# Altium PCB PCB1.PcbDoc
Units mil, origin at the board's own origin, x right, y up, seen from the top; angles counter-clockwise.
Board outline 6000 x 4000 mil, 4 copper layers (Top Layer, Int1 (GND), Int2 (PWR), Bottom Layer), stack 61.811 mil thick; 11 components, 24 nets, 109 pads, 29 vias.
Unrouted connection lines stored in the file: 36.
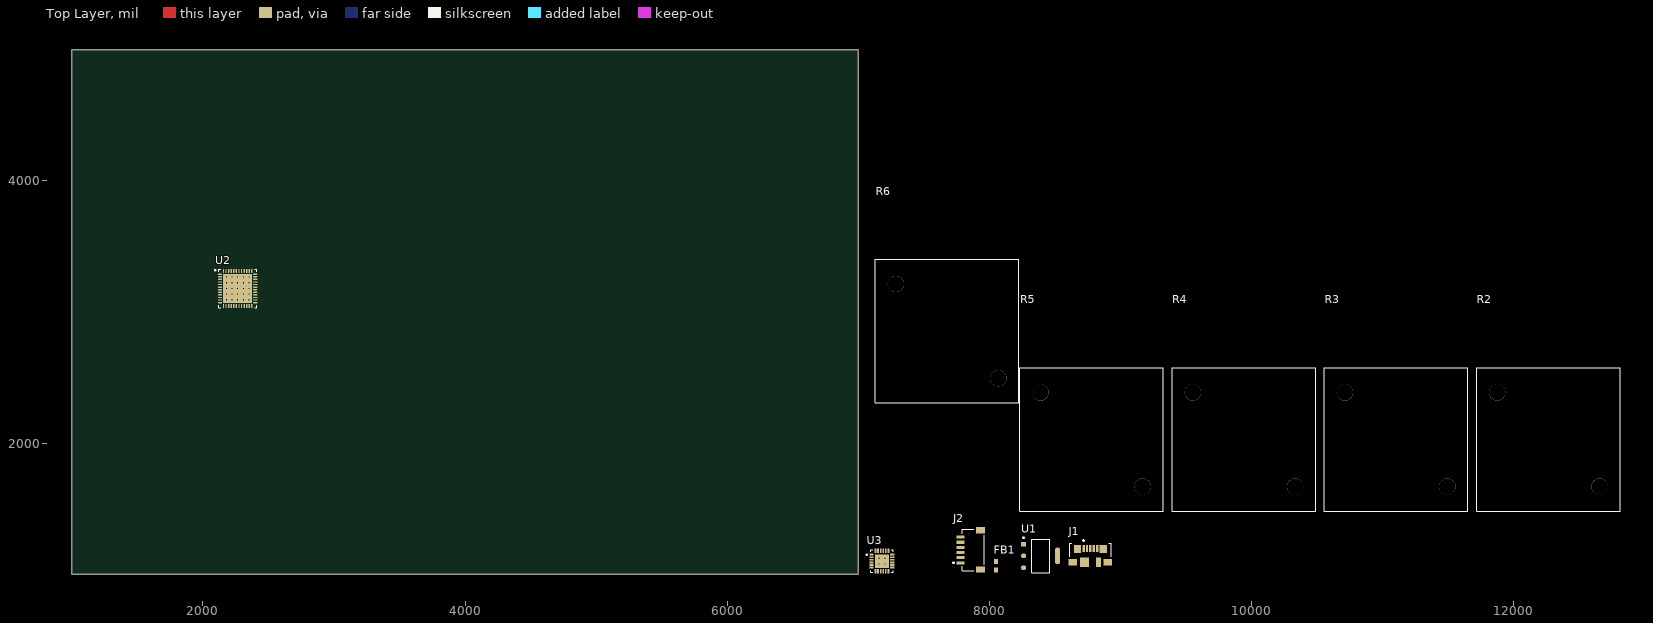
[diagram p0: Top Layer view]
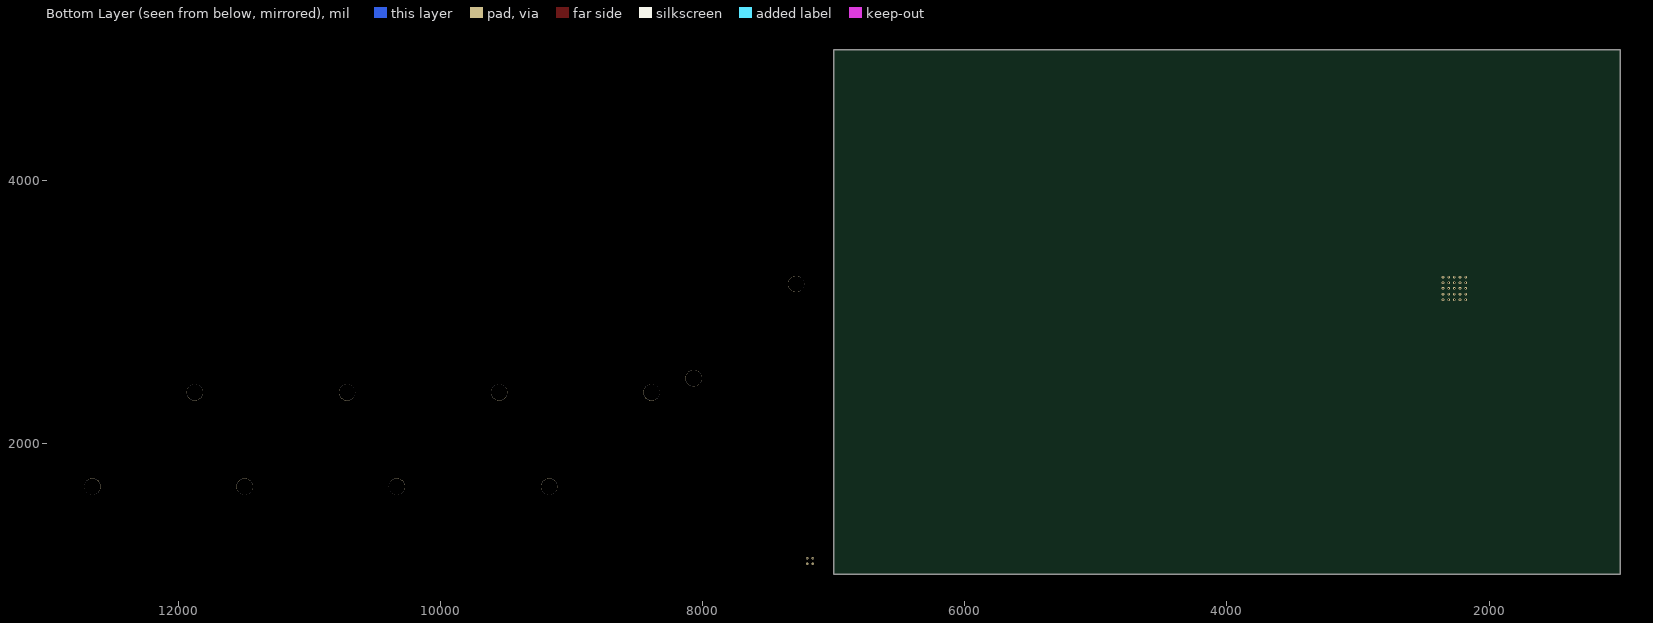
[diagram p1: Bottom Layer view, seen from below]

## Layer stack, top to bottom
Top Solder: solder mask 1, SM-001, Dk 4
Top Layer: signal copper 1.378
Dielectric 1: prepreg 7.874, PP-017, Dk 4.6
Int1 (GND): signal copper 0.689
Dielectric 3: core 41.9291, Core-039, Dk 4.6
Int2 (PWR): signal copper 0.689
Dielectric 5: prepreg 7.874, PP-017, Dk 4.6
Bottom Layer: signal copper 1.378
Bottom Solder: solder mask 1, SM-001, Dk 4

## Board outline
1000,1000 7000,1000 7000,5000 1000,5000

## Design rules (kind name [scope] priority, off if disabled: settings)
Clearance [All] p1: gap=0.2 ignorepadtopadclearanceinfootprint=FALSE
DiffPairsRouting [All] p1: maxlimit=10 minlimit=10 mostfreqgap=10 toplayer_minwidth=15 toplayer_maxwidth=15 toplayer_prefwidth=15 midlayer1_minwidth=15 midlayer1_maxwidth=15 midlayer1_prefwidth=15 midlayer2_minwidth=15 midlayer2_maxwidth=15 midlayer2_prefwidth=15 bottomlayer_minwidth=15 bottomlayer_maxwidth=15 bottomlayer_prefwidth=15 maxuncoupledlength=500
PolygonConnect [All] p1: connectstyle=Direct reliefconductorwidth=10 reliefentries=4 polygonreliefangle="90 Angle" airgapwidth=10
RoutingVias [All] p1: holewidth=28 width=50 viastyle="Through Hole" minholewidth=28 minwidth=50 maxholewidth=28 maxwidth=50
SolderMaskExpansion [All] p1: expansion=0 istentingtop=FALSE
SupplyNets "Schematic Supply Nets_5" [InNet('MCU_LED_K')] p1: voltage=0.000
SupplyNets "Schematic Supply Nets_4" [InNet('IMU_SCL')] p2: voltage=0.000
SupplyNets "Schematic Supply Nets_3" [InNet('VBUS')] p3: voltage=0.000
SupplyNets "Schematic Supply Nets_1" [InNet('+5V')] p4: voltage=0.000
UnRoutedNet [All] p1: checkbadconnections=TRUE
Width [All] p1: maxlimit=39.37 minlimit=7.87 preferedwidth=11.81 midlayer1_minwidth=10 midlayer1_maxwidth=10 midlayer1_prefwidth=10 midlayer2_minwidth=10 midlayer2_maxwidth=10 midlayer2_prefwidth=10 minimp=50.000000 maximp=50.000000 favimp=50.000000
28 further rules are at their usual default settings.

## Classes and differential pairs
differential pair class DIFF_USB: USB_D
differential pair USB_D: +USB_D_P -USB_D_N

## Components (designator, comment, footprint, x,y, rotation, side; value= is the part's Value field where it differs from the comment)
FB1 "120R" "WE-CBF HF_0603_HC" 8050,1065 r90 top
J1 "473460001" FP-473460001-MFG 8770,1105 r0 top
J2 "SM06B-SRSS-G-TB(LF)(SN)" FP-SM06B-SRSS-G-TB_LF_SN-MFG 7875,1185 r90 top
R2 "2K2" FP-RHA025-MFG 12263.75,2027.56 r90 top
R3 "2K2" FP-RHA025-MFG 11102.34,2027.56 r90 top
R4 "1K" FP-RHA025-MFG 9940.92,2027.56 r90 top
R5 "10K" FP-RHA025-MFG 8779.51,2027.56 r90 top
R6 "10K" FP-RHA025-MFG 7677.17,2854.33 r90 top
U1 "AMS1117-3.3" FP-AMS1117-IPC_C 8390,1140 r0 top
U2 "STM32F411CEU6" STM-UFQFPN48_L 2265,3180 r0 top
U3 "MPU-6050" IS-QFN-24_V 7180,1100 r0 top

## Footprints (in the part's own frame and the unit in brackets; to place one, negate y for a bottom-side part, rotate by r counter-clockwise, add the part's x,y. Pads: shape width x height; smd on the part's side, far side on the other; paste and mask are expansions set on the pad)
FP-473460001-MFG [mm]
  rect 0.45x1.38 smd paste+0 mask+0: 1(-1.3,2.31) 2(-0.65,2.31) 3(0,2.31) 4(0.65,2.31) 5(1.3,2.31)
  rect 1.425x1.55 smd paste+0 mask+0: 6(-2.488,2.225) 7(2.488,2.225)
  rect 1.65x1.3 smd paste+0 mask+0: 8(-3.375,-0.35) 11(3.375,-0.35)
  rect 1.8x1.9 smd paste+0 mask+0: 9(-1.15,-0.35)
  rect 1x1.9 smd paste+0 mask+0: 10(1.55,-0.35)
  silkscreen extent -4.05,0.67 4.05,3.97, body extent -4.3,-2.48 4.3,3.45, height 0.25
FP-AMS1117-IPC_C [mm]
  rect 1.004x0.872 smd paste+0 mask+0: 1(-3.295,2.29)
  rrect100% 1.004x0.872 smd paste+0 mask+0: 2(-3.295,0) 3(-3.295,-2.29)
  rrect87% 1.004x3.182 smd paste+0 mask+0: 4(3.295,0)
  silkscreen extent -3.42,-3.25 1.75,3.62, body extent -3.9,-3.35 3.9,3.35, height 0.25
FP-RHA025-MFG [mm]
  round 3.18 hole 3.18 unplated paste-2539.97 mask+0: ""(-9.13,-9.92) ""(9.13,9.92)
  silkscreen extent -13.88,-13.91 13.88,13.91, body extent -25.5,-14.01 25.5,14.01, height 0.25
FP-SM06B-SRSS-G-TB_LF_SN-MFG [mm]
  rect 0.6x1.55 smd paste+0 mask+0: 1(-2.5,2.45) 2(-1.5,2.45) 3(-0.5,2.45) 4(0.5,2.45) 5(1.5,2.45) 6(2.5,2.45)
  rect 1.2x1.8 smd paste+0 mask+0: 7(-3.8,-1.425) 8(3.8,-1.425)
  silkscreen extent -4,-2.12 4,3.92, body extent -4.5,-2.42 4.5,3.32, height 0.25
IS-QFN-24_V [mm] "QFN, 24-Leads, Body 4x4mm, Pitch 0.5mm, Thermal Pad 2.7x2.6mm"
  rect 0.8x0.35 smd: 1(-2,1.25) 2(-2,0.75) 3(-2,0.25) 4(-2,-0.25) 5(-2,-0.75) 6(-2,-1.25) 13(2,-1.25) 14(2,-0.75) 15(2,-0.25) 16(2,0.25) 17(2,0.75) 18(2,1.25)
  rect 0.35x0.85 smd mask+0.102: 7(-1.25,-1.975) 8(-0.75,-1.975) 9(-0.25,-1.975) 10(0.25,-1.975) 11(0.75,-1.975) 12(1.25,-1.975) 19(1.25,1.975) 20(0.75,1.975) 21(0.25,1.975) 22(-0.25,1.975) 23(-0.75,1.975) 24(-1.25,1.975)
  rect 2.7x2.6 smd: 25(0,0)
  silkscreen extent -3.07,-2.15 2.15,2.15, body extent -2,-2 2,2, height 0.95
STM-UFQFPN48_L [mm] "QFN, 48-Leads, Body 7.1x7.1mm, Pitch 0.5mm, Thermal Pad 5.6x5.6mm, IPC High Density"
  oval 0.8x0.25 smd: 1(-3.4,2.75) 2(-3.4,2.25) 3(-3.4,1.75) 4(-3.4,1.25) 5(-3.4,0.75) 6(-3.4,0.25) 7(-3.4,-0.25) 8(-3.4,-0.75) 9(-3.4,-1.25) 10(-3.4,-1.75) 11(-3.4,-2.25) 12(-3.4,-2.75) 25(3.4,-2.75) 26(3.4,-2.25) 27(3.4,-1.75) 28(3.4,-1.25) 29(3.4,-0.75) 30(3.4,-0.25) 31(3.4,0.25) 32(3.4,0.75) 33(3.4,1.25) 34(3.4,1.75) 35(3.4,2.25) 36(3.4,2.75)
  oval 0.25x0.8 smd: 13(-2.75,-3.4) 14(-2.25,-3.4) 15(-1.75,-3.4) 16(-1.25,-3.4) 17(-0.75,-3.4) 18(-0.25,-3.4) 19(0.25,-3.4) 20(0.75,-3.4) 21(1.25,-3.4) 22(1.75,-3.4) 23(2.25,-3.4) 24(2.75,-3.4) 37(2.75,3.4) 38(2.25,3.4) 39(1.75,3.4) 40(1.25,3.4) 41(0.75,3.4) 42(0.25,3.4) 43(-0.25,3.4) 44(-0.75,3.4) 45(-1.25,3.4) 46(-1.75,3.4) 47(-2.25,3.4) 48(-2.75,3.4)
  rect 5.6x5.6 smd: 49(0,0)
  silkscreen extent -4.47,-3.7 3.7,3.7, body extent -3.55,-3.55 3.55,3.55, height 0.6
"WE-CBF HF_0603_HC" [mm] "SMD EMI Suppression Ferrite  Bead, body 1.60x0.80mm"
  rect 0.95x0.7 smd: 1(-0.825,0) 2(0.825,0)
  body extent -0.8,-0.4 0.8,0.4, height 0.8

## Part data
FB1: library part CMP-0220-00101-3, "Ferrite Bead (emi Suppression), 1.6X0.8X0.8MM (0603), 600O Impedance At 100 Mhz", Case Code (Imperial)=0603, Case Code (Metric)=1608, Case/Package=SMD/SMT, Current Rating=400mA, DC Resistance (DCR)=220mΩ, Max Current Rating=500mA, Max Operating Temperature=125°C, Min Operating Temperature=-55°C, Resistance=350mΩ, Test Frequency=100MHz, Tolerance=25%, Core Material=Ferrite, Depth=800µm, Height=800µm, Impedance=600Ω, Lead Free="Lead Free", Length=1.6mm, Max DC Current=500mA, Mount="Surface Mount", Number of Lines=1, Number of Pins=2, REACH SVHC=Unknown, RoHS=Compliant, Termination=SMD/SMT, Width=800µm
J1: library part CMP-2000-05246-2, "CONN RCPT USB2.0 MICRO B SMD R/A", Current Rating=1.8A, Manufacturer=Molex, Package=0, Temperature="-30°C to +85°C", Temperature Range High=+85°C, Temperature Range Low=-30°C, Voltage Rating=30V, Automotive=No, Category=Conn, ComponentLink2Description=Datasheet, ComponentLink2URL=https://www.molex.com/webdocs/datasheets/pdf/en-us/0473460001_IO_CONNECTORS.pdf, Conn Orientation="Right Angle", Contact Material=Gold,Nickel, Device Class L1=Connectors, Device Class L2="USB Connectors", Device Class L3=unset, Digikey Description="CONN RCPT USB2.0 MICRO B SMD R/A", Footprint Url=https://www.molex.com/pdm_docs/sd/473460001_sd.pdf, Height=2.945mm, Is Female=yes, Lead Free=Yes, Manufacturer Part Number=473460001, Number Of Contacts=5, Octopart=https://octopart.com/47346-0001-molex-7164928, Pitch=0.65mm, RoHS=TRUE, Shielding=true, Usb Standard="USB 2.0"
J2: library part CMP-17439-000248-1, "6 Circuit Side Entry Shrouded SR Header", Connector Type=Header, Lead Free="Lead Free"
R2 R3 R4 R5: library part CMP-00030-120001975-1, "RHA0251K000FE02 Wirewound Chassis Mount Resistor", NexarPartId=120001975
R6: library part CMP-26527-006345-1, "0.33Ω ±1% 1W 2512 Thick Film Chip Resistor AEC-Q200 compliant", NexarPartId=120001975
U1: library part CMP-209535-000001-1, "LDO Voltage Regulators 1A, 3.3V", Dropout Voltage=1.1V, Manufacturer="Advanced Monolithic Systems", Max Junction Temp=+125°C, Max Power Dissipation=1.2W, Max Supply Voltage=15V, Nominal Supply Current=5mA, Output Current=1A, Output Voltage=3.3V, Package=AMS1117, Temperature="-40°C to +125°C", Temperature Range Low=-40°C, Automotive=No, Category=IC, ComponentLink2Description=Datasheet, ComponentLink2URL=http://www.advanced-monolithic.com/pdf/ds1117.pdf, Device Class L1="Integrated Circuits (ICs)", Device Class L2="Power Management ICs", Device Class L3="Voltage Regulators - Linear", Height=1.8mm, Ipc Land Pattern Name=SOT229P700X180-4, Lead Free=Yes, Manufacturer Part Number=AMS1117-3.3, Number Of Outputs=1, Octopart=https://octopart.com/ams1117-3.3-advanced+monolithic+systems-25899300, Output Type=Fixed, RoHS=TRUE, Standoff Height=0.64mm, Temperature Range High=+125°C
U2: library part CMP-0243-00165-1, "ARM Cortex-M4 32-bit MCU+FPU, 512 KB Flash, 128 KB RAM, 36 I/Os, 48-Pin UFQFPN, -40 to 85 degC, Tray", I/Os (High Current)=36, Operating Frequency(F) (Processor speed) (MHz)=100, Package Description=UFQFPN48, Package Reference="48-Pin Ultra Thin Fine Pitch Quad Flat No-Lead, 7 x 7 x 0.6 mm Body, 0.5 mm Pitch, Exposed Pad", Supply Voltage(Vcc) min (V)=1.7, ComponentLink1Description="Manufacturer URL", ComponentLink1URL=http://www.st.com/, ComponentLink2Description=Datasheet, ComponentLink2URL=http://www.st.com/st-web-ui/static/active/en/resource/technical/document/datasheet/DM00115249.pdf, Core="ARM Cortex-M4", DatasheetVersion="Rev. 6", FLASH Size (Prog) (kB)=512, Internal RAM Size (kB)=128, Mounting Technology="Surface Mount", Packing=Tray
U3: library part CMP-1753-00002-2, "3-Axis Gyroscope, Accelerometer and a Digital Motion Processor(TM) (DMP), 2.375 to 3.46 V, -40 to 85 degC, 24-Pin QFN, RoHS, Tape and Reel", Manufacturer=InvenSense, Standard Package=5,000, Category=Sensors,Transducers, Datasheet URL=http://datasheet.octopart.com/MPU-6050-InvenSense-datasheet-14421344.pdf, Datasheet Version="Rev. 3.3, 05/2012", Dynamic Catalog=MPU-6000™Series, Family=Multifunction, Featured Product=MPU-60506-Axis,IntegratedI²CSolution, Manufacturer URL=http://www.invensense.com/, Online Catalog=MPU-6000™Series, Other Names="1428-1007-2 / MPU6050", Output Type=Digital, Sensor Type=MotionTracking, Unit PriceUSD=Digital

## Via types
v1: diameter 19.68, hole 7.87, Top Layer to Bottom Layer, 29 vias

## Nets (pads, with @x,y where several pads share a name; then routed paths per layer and width w, separated by ;. In a path a pad name is that pad's centre, name@x,y a point inside that pad or via, vN(x,y) a via of type N, cw(c..) or ccw(c..) an arc to the next point about the centre after c; other vN are vias at no path point)
+5V: FB1.2 U1.3
IMU_CPOUT: U3.20
IMU_INT: U3.12
IMU_REGOUT: U3.10
IMU_SCL: J2.1 U1.2 U1.4 U2.1 U2.9 U2.24 U2.36 U2.42 U2.43 U2.48 U3.8 U3.13 U3.23 U3.24
LED_PWR_K: 
MCU_BOOT0: U2.44
MCU_LED_A: U2.26
MCU_LED_K: J1.5 J2.6 U1.1 U2.8 U2.23 U2.35 U2.47 U2.49 U3.1 U3.2 U3.3 U3.4 U3.9 U3.11 U3.18 U3.25
  other v1: 7158.35,1078.35 7201.65,1078.35 7158.35,1121.65 7201.65,1121.65 2178.39,3093.39 2221.69,3093.39 2265,3093.39 2308.31,3093.39 2351.61,3093.39 2178.39,3136.69 2221.69,3136.69 2265,3136.69 2308.31,3136.69 2351.61,3136.69 2178.39,3180 2221.69,3180 2265,3180 2308.31,3180 2351.61,3180 2178.39,3223.31 2221.69,3223.31 2265,3223.31 2308.31,3223.31 2351.61,3223.31 2178.39,3266.61 2221.69,3266.61 2265,3266.61 2308.31,3266.61 2351.61,3266.61
MCU_NRST: U2.7
MCU_OSC_IN: U2.5
MCU_OSC_OUT: U2.6
MCU_PA4: J2.2 U2.14
MCU_PA5: J2.3 U2.15
MCU_PA6: J2.4 U2.16
MCU_PA7: J2.5 U2.17
MCU_SDW: U2.39
MCU_SWCLK: U2.37
MCU_SWDIO: U2.34
MCU_VCAP1: U2.22
NetC12_2: 
USB_D_N: J1.2 U2.32
USB_D_P: J1.3 U2.33
VBUS: FB1.1 J1.1
pads on no net: J1.4 J1.6 J1.7 J1.8 J1.9 J1.10 J1.11 J2.7 J2.8 R2. R3. R4. R5. R6. U2.2 U2.3 U2.4 U2.10 U2.11 U2.12 U2.13 U2.18 U2.19 U2.20 U2.21 U2.25 U2.27 U2.28 U2.29 U2.30 U2.31 U2.38 U2.40 U2.41 U2.45 U2.46 U3.5 U3.6 U3.7 U3.14 U3.15 U3.16 U3.17 U3.19 U3.21 U3.22